# EAGLE board ModuleV2 (EAGLE 5.09)
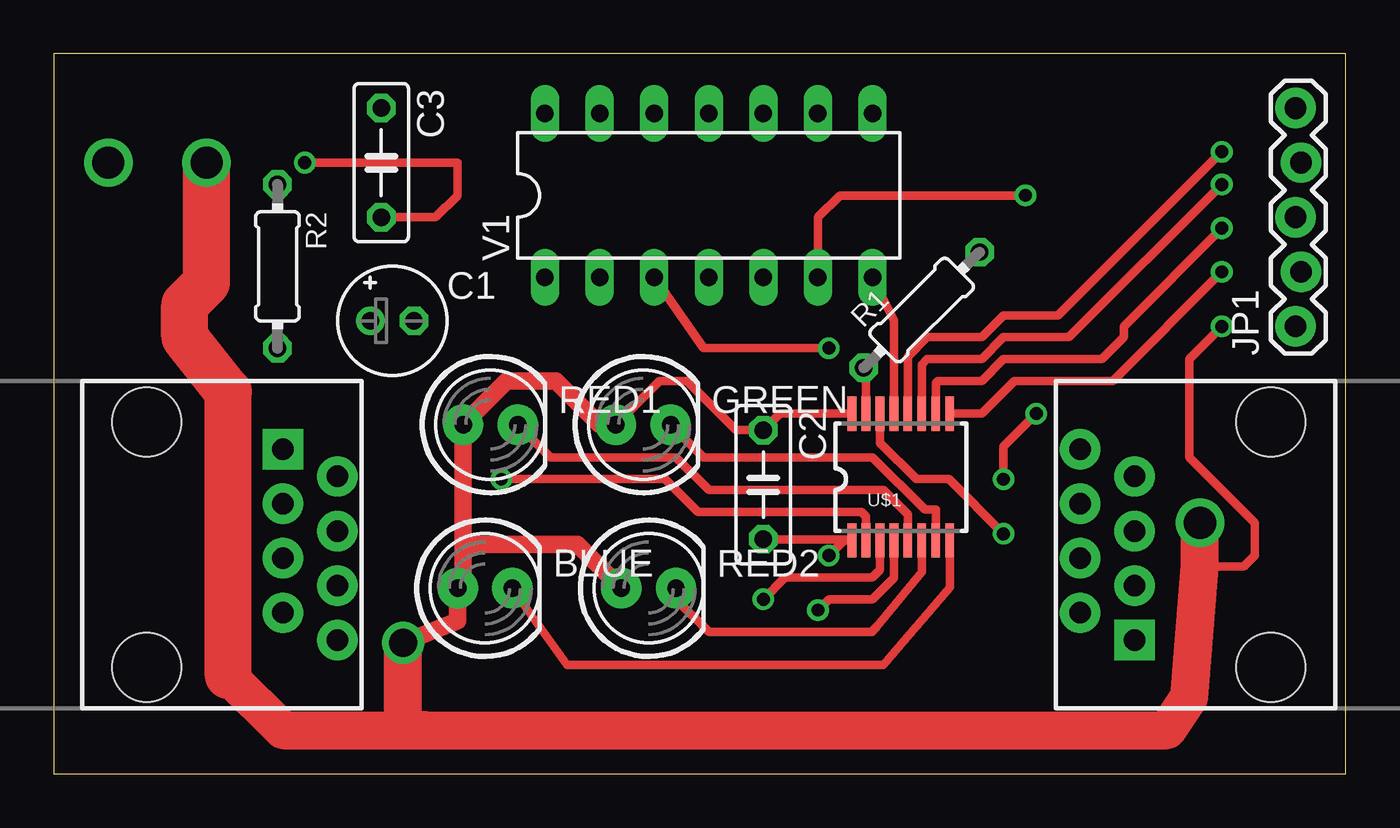
[diagram p0: board, top side]
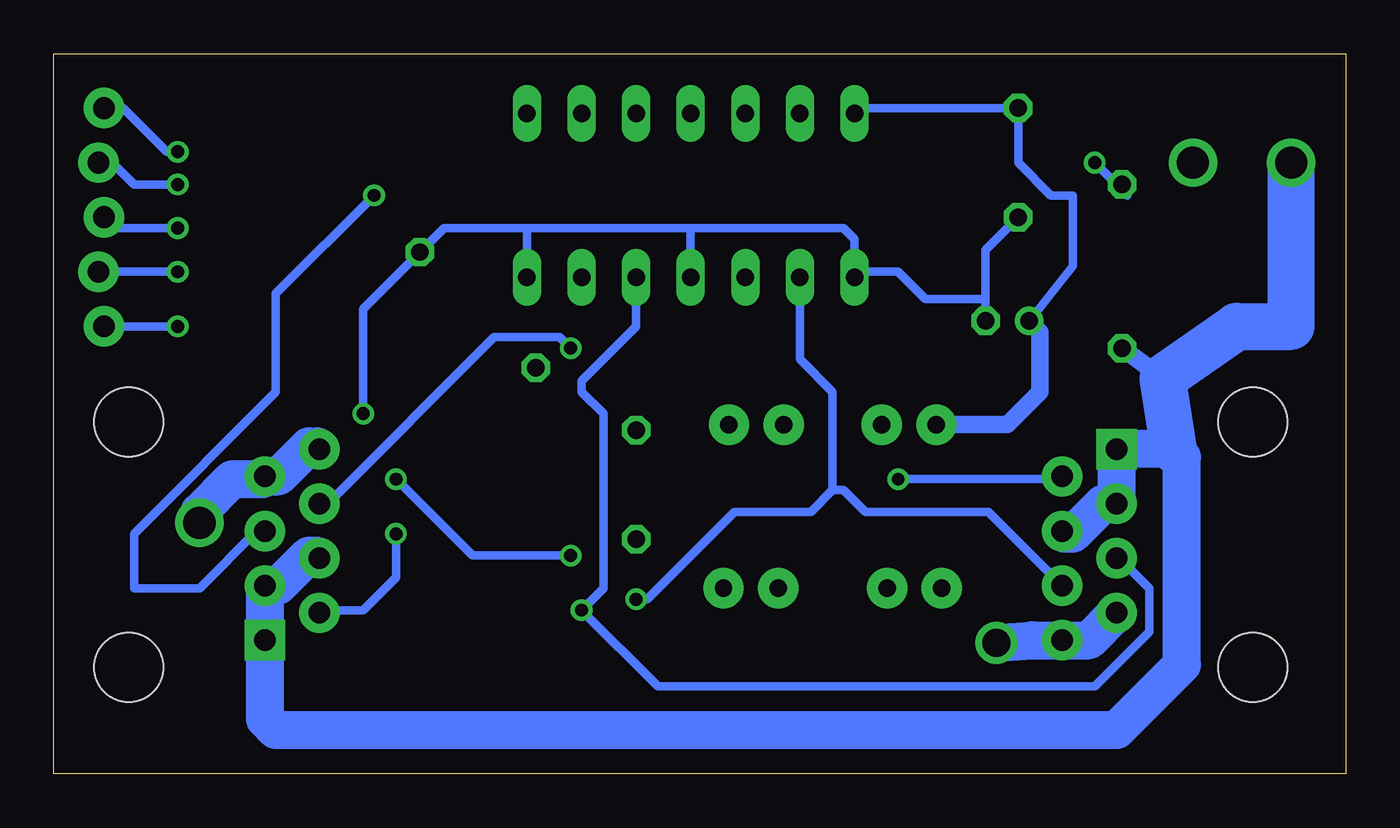
[diagram p1: board, bottom side, seen from below]

Size 60.12 x 33.52 mm. Coordinates in mm from the lower left corner, seen from the top.
Outline: 0,0 60.12,0 60.12,33.52 0,33.52 0,0
Copper layers (1*16): Top 0.035mm / dielectric 1.5mm / Bottom 0.035mm
Design rules "default *": minimum track width 10mil, minimum drill 23mil, track to track 8mil, track to pad 8mil, pad to pad 8mil, via to via 8mil, smd to smd 8mil, copper to edge 40mil, drill to drill 8mil, minimum pad ring 10mil, minimum via ring 8mil, stop-mask expansion 4mil, vias tented up to drill 0mil, thermal gap 10mil

## Footprints (pad centres in the part's own frame; a part is rotated, then mirrored left to right if it is on the bottom)
LED5MM = drill 0.813 pad 1.88 round: A -1.27,0; K 1.27,0
E2-5 = drill 0.813 pad 1.27 round: + -1.016,0 | drill 0.813 pad 1.27 octagon: - 1.016,0
C050-025X075 = drill 0.813 octagon: 1 -2.54,0; 2 2.54,0
RJ45-8 = drill 1 pad 1.88 square: 1 -4.445,6.35 | drill 1 pad 1.88 round: 2 -3.175,8.89; 3 -1.905,6.35; 4 -0.635,8.89; 5 0.635,6.35; 6 1.905,8.89; 7 3.175,6.35; 8 4.445,8.89 | hole 3.2: -5.715,0; 5.715,0
1X05_LOCK = drill 1.016 pad 1.88 round: 1 0,0.127; 2 2.54,-0.127; 3 5.08,0.127; 4 7.62,-0.127; 5 10.16,0.127
0204/7 = drill 0.813 octagon: 1 -3.81,0; 2 3.81,0
TSSOP16 = smd 0.4 x 1.6: 1 -2.225,-2.85; 2 -1.575,-2.85; 3 -0.925,-2.85; 4 -0.275,-2.85; 5 0.375,-2.85; 6 1.025,-2.85; 7 1.675,-2.85; 8 2.325,-2.85; 9 2.325,3.05; 10 1.675,3.05; 11 1.025,3.05; 12 0.375,3.05; 13 -0.275,3.05; 14 -0.925,3.05; 15 -1.575,3.05; 16 -2.225,3.05
DIL14 = drill 0.813 long: 1 -7.62,-3.81; 2 -5.08,-3.81; 3 -2.54,-3.81; 4 0,-3.81; 5 2.54,-3.81; 6 5.08,-3.81; 7 7.62,-3.81; 8 7.62,3.81; 9 5.08,3.81; 10 2.54,3.81; 11 0,3.81; 12 -2.54,3.81; 13 -5.08,3.81; 14 -7.62,3.81

## Placement (x,y rotation side)
BLUE  [LED5MM]  20.07,8.64 0 top
C1  [E2-5]  15.75,21.08 0 top
C2  [C050-025X075]  33.02,13.46 270 top
C3  [C050-025X075]  15.24,28.45 270 top
GREEN  [LED5MM]  27.43,16.26 0 top
IN  RJ45-8PTH  [RJ45-8]  4.32,10.67 270 top
JP1  [1X05_LOCK]  57.91,20.83 90 top
OUT  RJ45-8PTH  [RJ45-8]  56.64,10.67 90 top
R1  [0204/7]  40.39,21.59 45 top
R2  [0204/7]  10.41,23.62 270 top
RED1  [LED5MM]  20.32,16.26 0 top
RED2  [LED5MM]  27.69,8.64 0 top
U$1  PCA9922  [TSSOP16]  39.37,13.72 0 top
V1  74125N  [DIL14]  30.48,26.92 0 top

## Library data of the parts
BLUE GREEN IN JP1 OUT RED1 RED2 = SparkFun
C1-C3 R1 R2 = resistor
U$1 = Custom
V1 = 74ttl-din

## Nets
+5V: BLUE.A C1.+ C2.1 C3.1 GREEN.A IN.7 IN.8 JP1.1 OUT.7 OUT.8 RED1.A RED2.A U$1.16 V1.14
BLUE: BLUE.K U$1.8
BLUE_OUT: JP1.5 U$1.12
DATA_IN: IN.2 U$1.2
DATA_OUT: OUT.2 U$1.14
GND: C1.- C2.2 C3.2 R1.2 R2.1 U$1.1 U$1.13 V1.1 V1.4 V1.7
GND_PWR: IN.1 IN.3 IN.4 OUT.1 OUT.3 OUT.4 R2.2
GREEN: GREEN.K U$1.7
GREEN_OUT: JP1.4 U$1.11
N$13: R1.1 U$1.15
RED1: RED1.K U$1.5
RED1_OUT: JP1.2 U$1.9
RED2: RED2.K U$1.6
RED2_OUT: JP1.3 U$1.10
SH_CLK: IN.6 U$1.3 V1.2
SH_CLK_OUT: OUT.6 V1.3
ST_CLK: IN.5 U$1.4 V1.5
ST_CLK_OUT: OUT.5 V1.6

## Tracks (layer width: path | path; a pad name or v marks a point on that pad's centre or on a via)
+5V  (via drill 0.6, 1.3, 1.5)
  Top 0.406: 53.34,9.65 55.37,9.65 55.88,10.16 55.88,11.68 52.83,14.73 52.83,19.3 v54.36,20.83 | GREEN.A 28.19,18.29 29.46,18.29 31.75,16 C2.1 33.78,16.77 U$1.16
  Top 0.813: GREEN.A 25.4,16.26 23.37,18.29 21.08,18.29 RED1.A 19.05,10.67 | 19.05,10.67 19.05,8.89 BLUE.A 18.8,7.11 v16.26,6.1 | RED2.A 24.38,10.67 19.05,10.67 | 17.27,2.03 16.26,3.05
  Top 1.778: 16.26,3.05 v16.26,6.1 | v53.34,11.68 53.34,9.65 52.83,3.56 51.82,2.03 17.27,2.03 10.67,2.03 8.13,4.57
  Top 2.184: 8.13,4.57 8.13,17.78 6.1,20.32 6.1,21.84 7.11,22.86 v7.11,28.45
  Bottom 0.406: v54.36,20.83 JP1.1 | C1.+ 12.7,23.62 12.7,26.92 13.72,26.92 15.24,28.45 C3.1 22.61,30.99 V1.14
  Bottom 0.813: RED1.A 15.75,16.26 14.22,17.78 14.22,20.57 C1.+
  Bottom 1.778: v16.26,6.1 14.61,6.22 IN.8 11.94,6.22 IN.7 | v53.34,11.68 53.34,12.19 51.82,13.72 50.42,13.72 OUT.7 49.66,13.84 48.26,15.24 47.88,15.24 OUT.8
BLUE
  Top 0.406: U$1.8 41.7,8.68 38.61,5.08 23.88,5.08 BLUE.K
BLUE_OUT  (via drill 0.6)
  Top 0.406: U$1.12 39.74,19.43 40.64,20.32 43.18,20.32 44.2,21.34 46.74,21.34 v54.36,28.96
  Bottom 0.406: v54.36,28.96 54.86,28.96 56.9,30.99 JP1.5
DATA_IN  (via drill 0.6)
  Top 0.406: U$1.2 37.8,11.99 37.59,12.19 29.97,12.19 28.45,13.72 v20.83,13.72
  Bottom 0.406: v20.83,13.72 13.34,13.72 IN.2
DATA_OUT  (via drill 0.6)
  Top 0.406: U$1.14 38.45,15.4 40.13,13.72 41.66,13.72 v44.2,11.18
  Bottom 0.406: v44.2,11.18 44.2,9.14 45.72,7.62 47.62,7.62 OUT.2
GND  (via drill 0.6)
  Top 0.406: C2.2 37.15,10.92 U$1.1 36.77,10.87 v36.07,10.16 | U$1.13 39.09,21.1 V1.7 | v44.2,13.72 44.2,15.24 v45.72,16.76 | v11.68,28.45 18.8,28.45 18.8,26.92 17.78,25.91 C3.2
  Bottom 0.406: 38.1,25.4 V1.7 | 30.48,25.4 38.1,25.4 | 30.48,25.4 V1.4 | 30.48,25.4 23.37,25.4 22.86,24.89 V1.1 22.61,23.37 20.83,23.37 19.56,22.1 16.76,22.1 | 16.76,22.1 C1.- | v45.72,16.76 45.72,21.64 R1.2 41.96,25.4 38.1,25.4 | 16.76,22.1 16.76,24.38 C3.2 | R2.1 10.16,26.92 v11.68,28.45 | v36.07,10.16 40.64,10.16 v44.2,13.72
GND_PWR  (via drill 1.5)
  Bottom 0.813: 8.51,18.41 R2.2
  Bottom 1.778: IN.4 13.08,11.18 12.7,11.18 11.3,12.57 IN.3 IN.1 8,15.11 7.62,14.73 7.62,5.08 10.67,2.03 49.78,2.03 50.29,2.54 OUT.1 OUT.3 49.66,8.76 48.26,10.16 47.88,10.16 OUT.4
  Bottom 2.184: 8,15.11 8.51,18.41 5.08,20.83 2.54,20.83 v2.54,28.45
GREEN
  Top 0.406: U$1.7 41.05,12.29 40.54,12.29 38.1,14.73 30.23,14.73 GREEN.K
GREEN_OUT  (via drill 0.6)
  Top 0.406: U$1.11 40.4,19.06 40.64,19.3 43.18,19.3 44.2,20.32 47.24,20.32 v54.36,27.43
  Bottom 0.406: v54.36,27.43 56.39,27.43 57.4,28.45 JP1.4
N$13
  Top 0.406: U$1.15 37.8,18.79 R1.1
RED1
  Top 0.406: U$1.5 39.74,12.07 38.61,13.21 30.48,13.21 28.96,14.73 23.11,14.73 RED1.K
RED1_OUT  (via drill 0.6)
  Top 0.406: U$1.9 43.18,16.77 44.7,18.29 49.28,18.29 v54.36,23.37
  Bottom 0.406: v54.36,23.37 JP1.2
RED2
  Top 0.406: U$1.6 40.4,9.41 38.3,6.85 | 38.3,6.85 38.1,6.6 | RED2.K 28.96,8.13 30.48,6.6 38.05,6.6 38.3,6.85
RED2_OUT  (via drill 0.6)
  Top 0.406: U$1.10 41.05,18.18 41.15,18.29 43.18,18.29 44.2,19.3 48.77,19.3 49.78,20.32 49.78,20.83 v54.36,25.4
  Bottom 0.406: v54.36,25.4 57.28,25.4 JP1.3
SH_CLK  (via drill 0.6)
  Top 0.406: U$1.3 38.45,9.49 38.1,9.14 34.04,9.14 v33.02,8.13
  Bottom 0.406: v33.02,8.13 32.51,8.13 28.45,12.19 24.89,12.19 23.88,13.21 | 23.88,13.21 23.88,17.78 25.4,19.3 V1.2 | 23.88,13.21 23.37,13.21 22.35,12.19 16.64,12.19 IN.6
SH_CLK_OUT  (via drill 0.6)
  Top 0.406: v36.07,19.81 30.23,19.81 V1.3
  Bottom 0.406: OUT.6 47.37,12.57 39.62,20.32 36.58,20.32 v36.07,19.81
ST_CLK  (via drill 0.6)
  Top 0.406: U$1.4 39.09,9.12 38.1,8.13 36.07,8.13 v35.56,7.62
  Bottom 0.406: V1.5 33.02,20.83 35.56,18.29 35.56,17.78 34.54,16.76 34.54,8.64 v35.56,7.62 32,4.06 11.68,4.06 9.14,6.6 9.14,8.64 10.54,10.03 IN.5
ST_CLK_OUT  (via drill 0.6)
  Top 0.406: v45.21,26.92 36.58,26.92 35.56,25.91 V1.6
  Bottom 0.406: OUT.5 50.67,11.3 53.34,8.64 56.39,8.64 56.39,11.18 49.78,17.78 49.78,22.35 v45.21,26.92